# Altium PCB PCB1.PcbDoc
Units mil, origin at the board's own origin, x right, y up, seen from the top; angles counter-clockwise.
Board outline 1550 x 1086.3 mil, 2 copper layers (Top Layer, Bottom Layer); 11 components, 21 nets, 59 pads, 0 vias.
Unrouted connection lines stored in the file: 1.
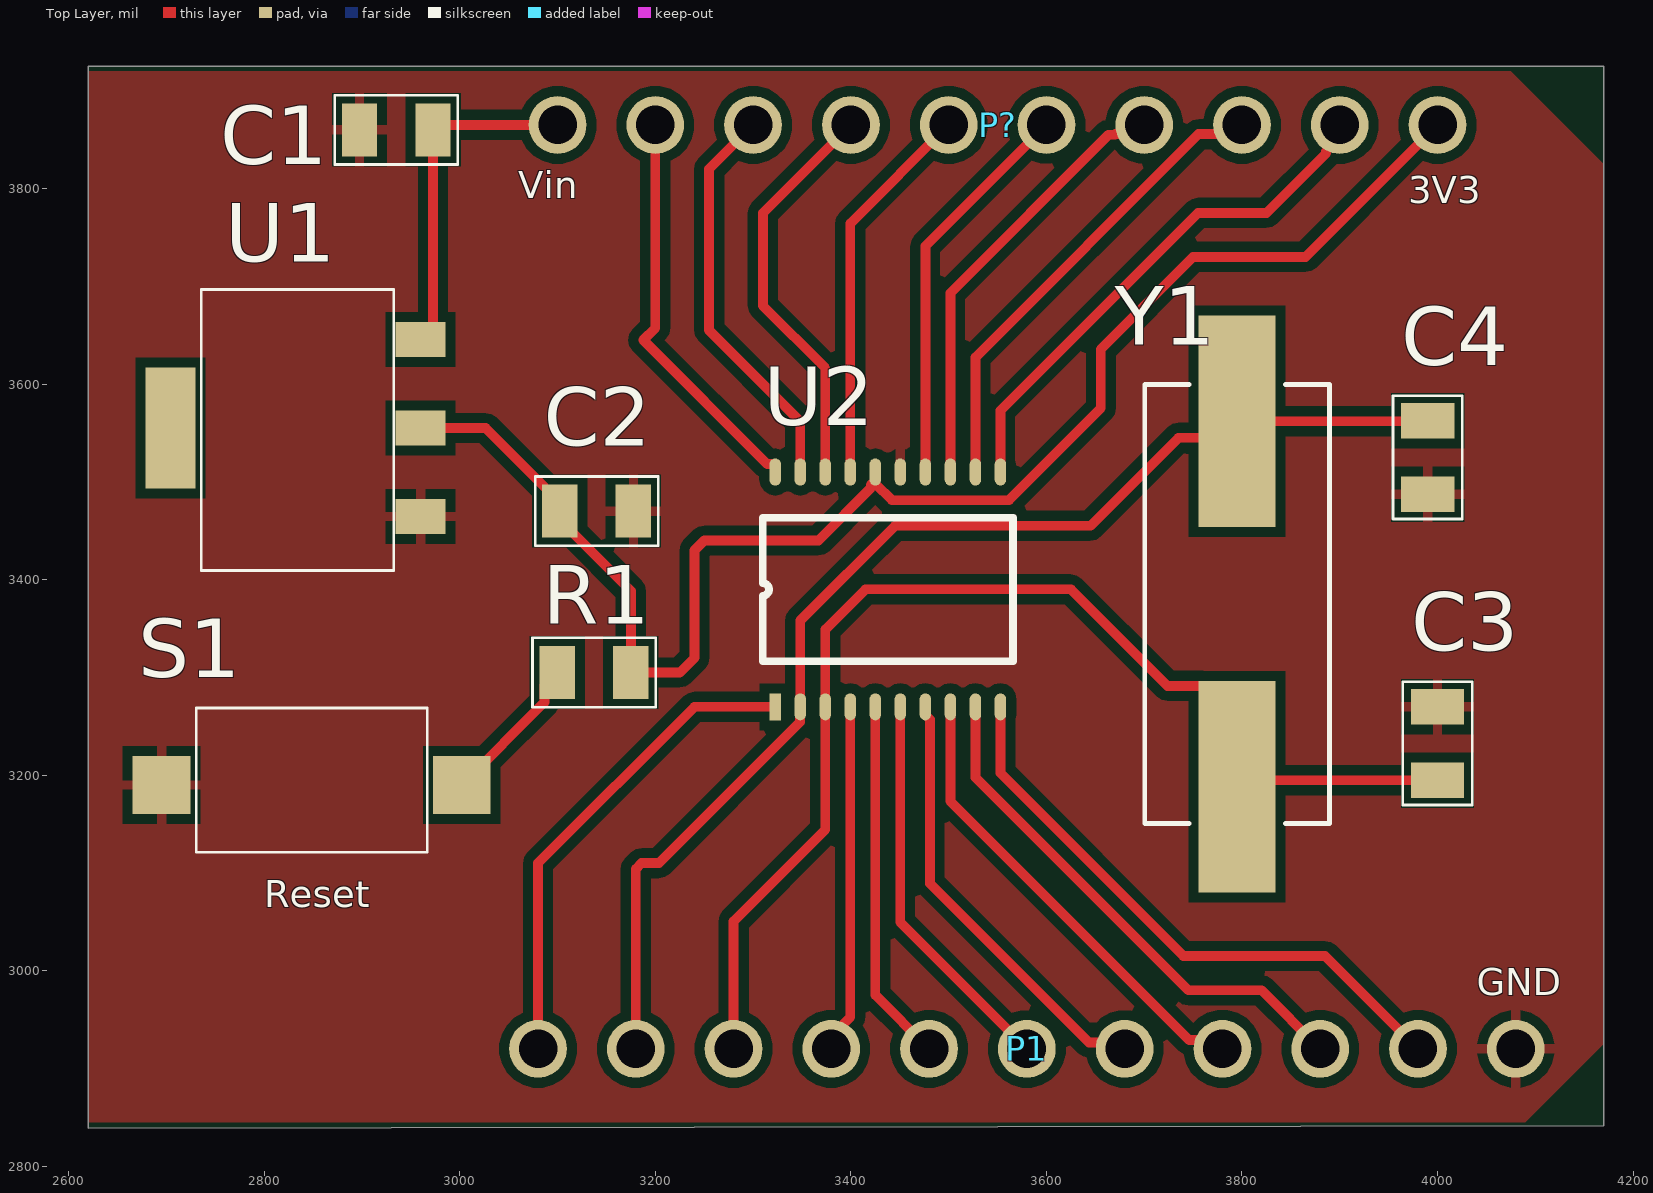
[diagram p0: Top Layer view]
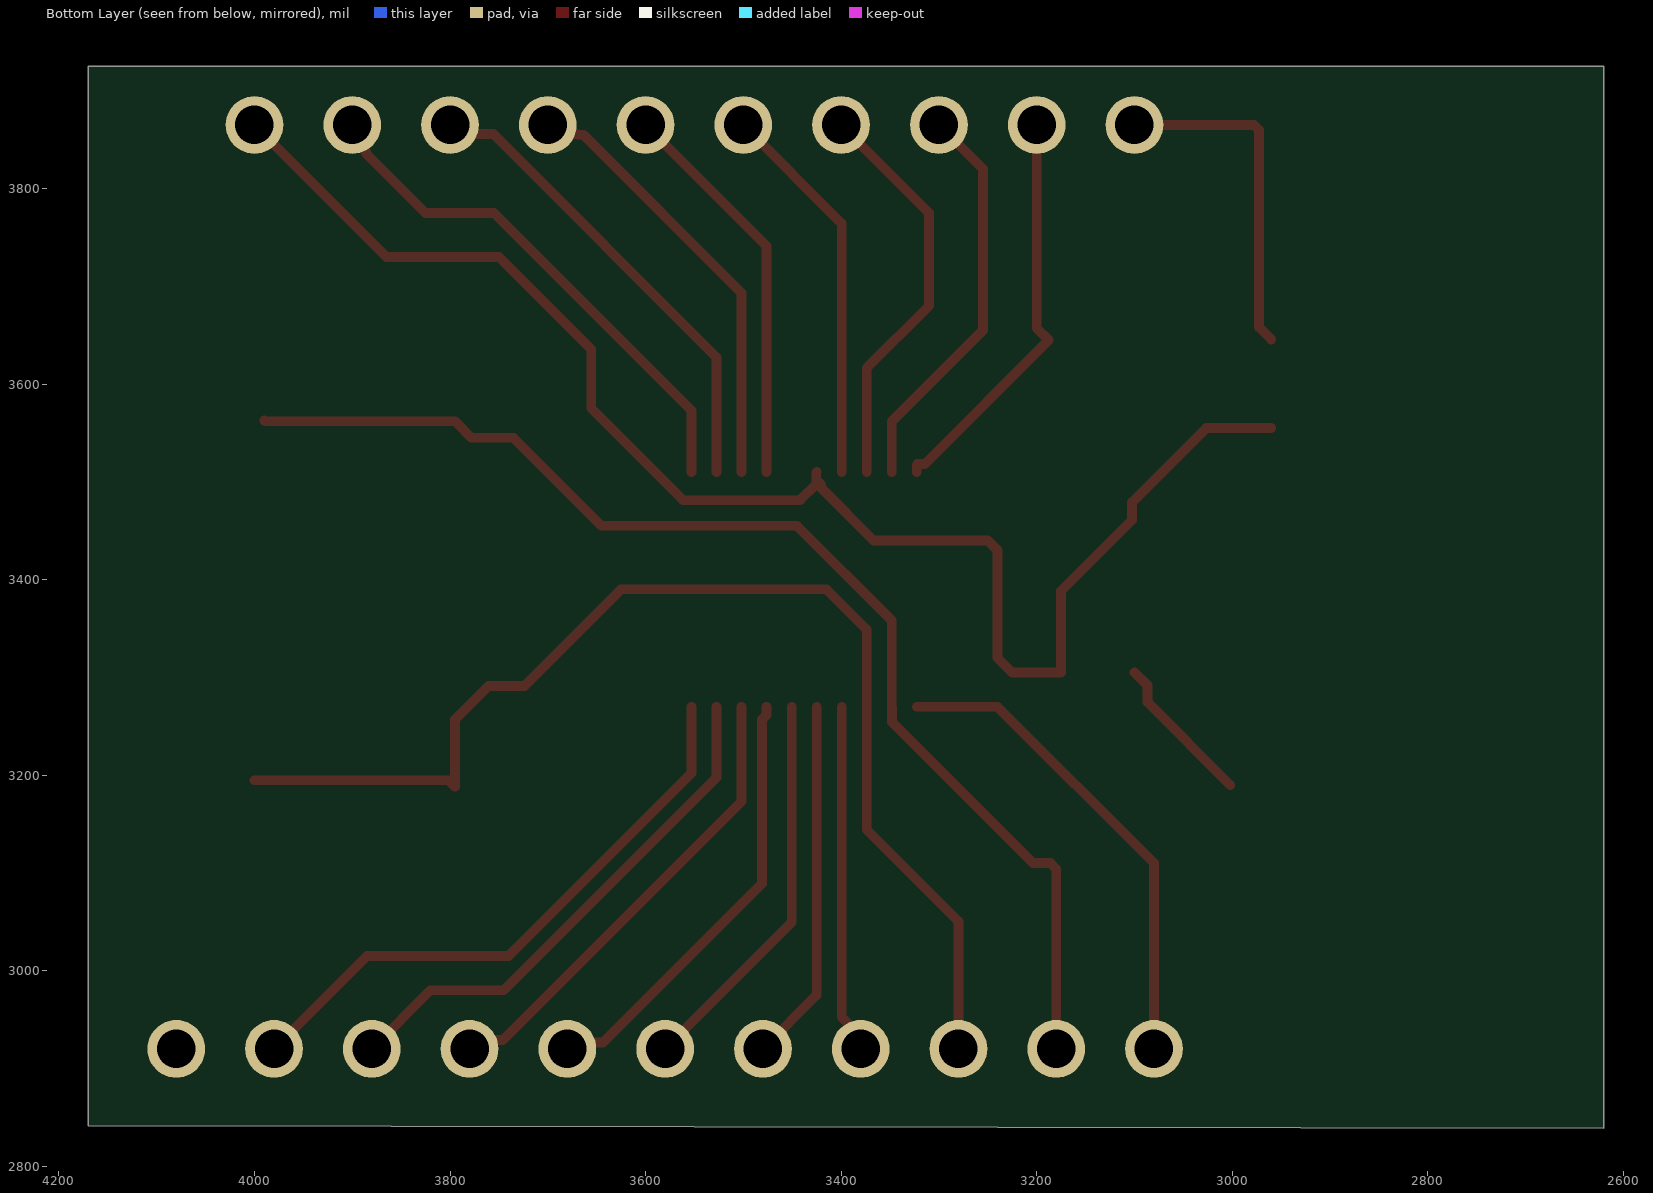
[diagram p1: Bottom Layer view, seen from below]
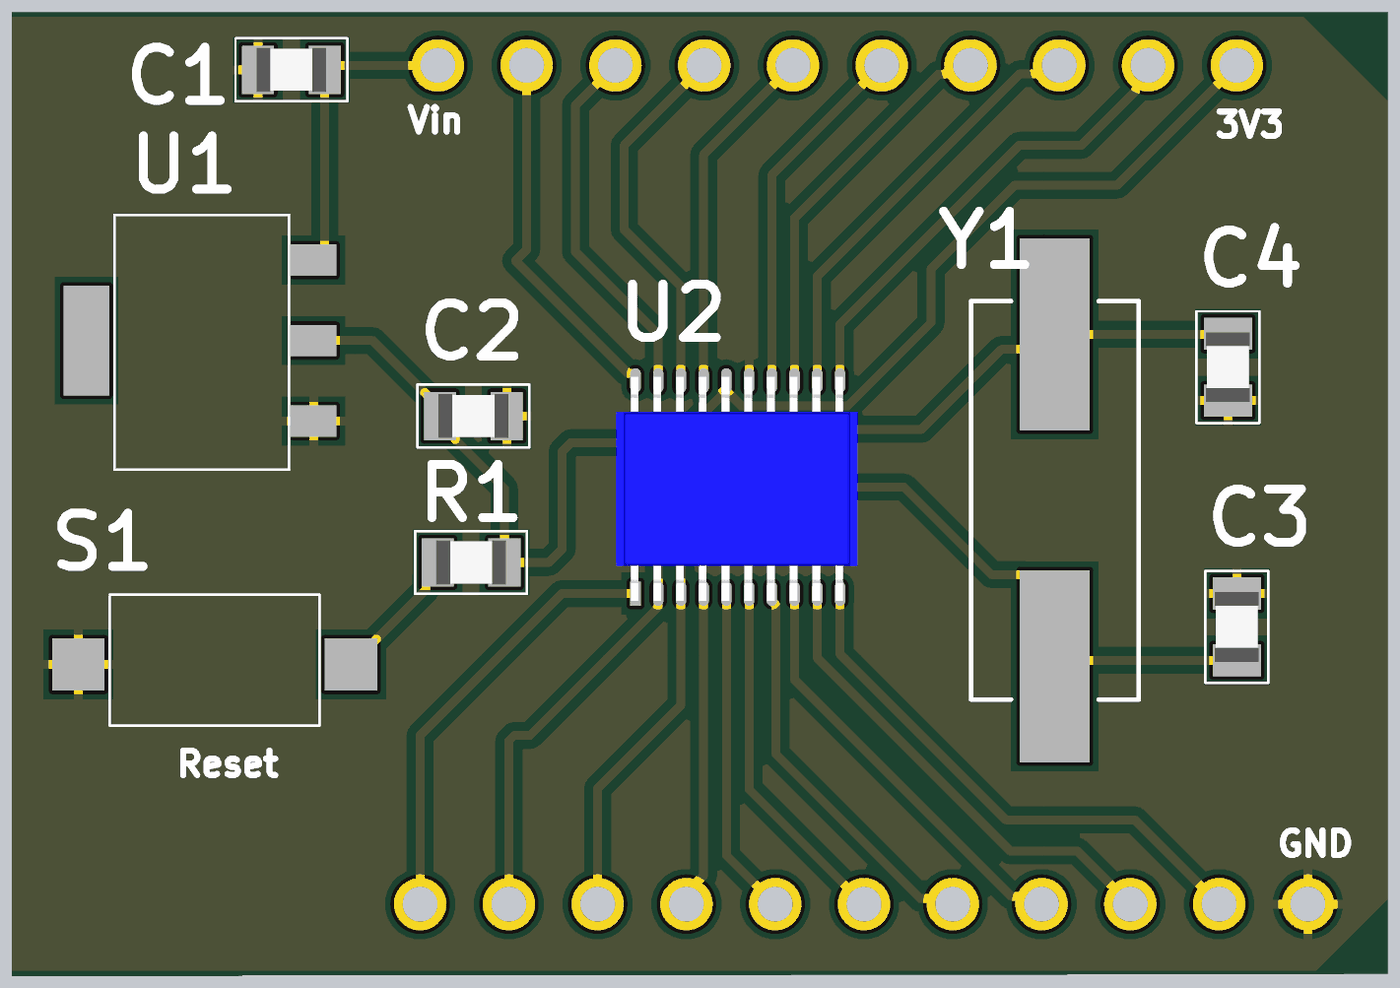
[diagram p2: 3D render of the assembled board from above, using the file's embedded part models]

## Layer stack, top to bottom
Top Solder: solder mask 0.4, Solder Resist, Dk 3.5
Top Layer: signal copper 1.4
Dielectric 1: dielectric 12.6, FR-4, Dk 4.8
Bottom Layer: signal copper 1.4
Bottom Solder: solder mask 0.4, Solder Resist, Dk 3.5

## Board outline
2620,2838.7 2620,3925 4170,3925 4170,2841.46

## Design rules (kind name [scope] priority, off if disabled: settings)
Clearance [All] p1: gap=10 ignorepadtopadclearanceinfootprint=FALSE except(0: Arc-Hole Track-Hole SMDPad-Hole THPad-Hole Via-Hole Fill-Hole Poly-Hole Region-Hole Text-Hole)
PolygonConnect [All] p1: connectstyle=Relief reliefconductorwidth=10 reliefentries=4 polygonreliefangle="90 Angle" airgapwidth=10
RoutingVias [All] p1: holewidth=28 width=50 viastyle="Through Hole" minholewidth=28 minwidth=50 maxholewidth=28 maxwidth=50
SolderMaskExpansion [All] p1: expansion=4 istentingtop=FALSE
Width [All] p1: maxlimit=10 minlimit=10 preferedwidth=10
30 further rules are at their usual default settings.

## Components (designator, comment, footprint, x,y, rotation, side; value= is the part's Value field where it differs from the comment)
C1 "10uF" "0805 package" 2935,3860 r180 top
C2 "22uF" "0805 package" 3140,3470 r0 top
C3 "20pF" "0805 package" 4000,3232.4 r270 top
C4 "20pF" "0805 package" 3990,3525 r90 top
P1 "header1" headers 3480,2920 r0 top
P? "header2" "headers 2" 3500,3865 r0 top
R1 "resistor 10k" "0805 package" 3137.4,3305 r0 top
S1 "switch" switch 2848.54,3190 r0 top
U1 "AMS1117" AMS1117 2830.08,3555 r90 top
U2 "STM32F030" "TSSOP20 package" 3322.64,3269.84 r90 top
Y1 "8mhz" "8Mhz oscilator" 3795,3375 r90 top

## Footprints (in the part's own frame and the unit in brackets; to place one, negate y for a bottom-side part, rotate by r counter-clockwise, add the part's x,y. Pads: shape width x height; smd on the part's side, far side on the other; paste and mask are expansions set on the pad)
"8Mhz oscilator" [mm]
  rect 5.5x2 smd: 1(-4.75,0) 2(4.75,0)
  silkscreen extent -5.7,-2.4 5.7,2.4
"0805 package" [mm]
  rect 0.92x1.38 smd: 1(-0.955,0) 2(0.955,0)
  silkscreen extent -1.6,-0.9 1.6,0.9, body extent -1,-0.63 1,0.63, height 0.43
AMS1117 [mm]
  rect 0.9x1.3 smd: 1(-2.3,-3.3) 2(0,-3.3) 3(2.3,-3.3)
  rect 3.15x1.3 smd: 4(0,3.2)
  silkscreen extent -3.7,-2.6 3.6,2.4
headers [mm]
  round 1.5 hole 1: 1(-10.16,0) 2(-7.62,0) 3(-5.08,0) 4(-2.54,0) 5(0,0) 6(2.54,0) 7(5.08,0) 8(7.62,0) 9(10.16,0) 10(12.7,0) 11(15.24,0)
"headers 2" [mm]
  round 1.5 hole 1: 1(-10.16,0) 2(-7.62,0) 3(-5.08,0) 4(-2.54,0) 5(0,0) 6(2.54,0) 7(5.08,0) 8(7.62,0) 9(10.16,0) 10(12.7,0)
switch [mm]
  rect 1.5x1.5 smd: 1(-3.9,0) 2(3.9,0)
  silkscreen extent -3,-1.75 3,2
"TSSOP20 package" [mm]
  rect 0.7x0.3 smd: 1(0,0)
  oval 0.7x0.3 smd: 2(0,-0.65) 3(0,-1.3) 4(0,-1.95) 5(0,-2.6) 6(0,-3.25) 7(0,-3.9) 8(0,-4.55) 9(0,-5.2) 10(0,-5.85) 11(6.1,-5.85) 12(6.1,-5.2) 13(6.1,-4.55) 14(6.1,-3.9) 15(6.1,-3.25) 16(6.1,-2.6) 17(6.1,-1.95) 18(6.1,-1.3) 19(6.1,-0.65) 20(6.1,0)
  silkscreen extent 1.18,-6.18 4.92,0.33, body extent -0.2,-6.35 6.2,0.55, height 1.1

## Part data
C1: library part "capacitor 10uF"
C2: library part "capacitor 22uF"
C3 C4: library part "capacitor 20pF"
Y1: library part "8mhz oscilator"

## Nets (pads, with @x,y where several pads share a name; then routed paths per layer and width w, separated by ;. In a path a pad name is that pad's centre, name@x,y a point inside that pad or via, vN(x,y) a via of type N, cw(c..) or ccw(c..) an arc to the next point about the centre after c; other vN are vias at no path point)
3V3: C2.1 P?.10 R1.2 U1.2 U2.16 | length 1564.1
  Top Layer w10: U1.2 3026.46,3555 3102.4,3479.06 C2.1 3102.4,3460.94 3175,3388.35 R1.2 3225,3305 3240,3320 3240,3430 3250,3440 3366.85,3440 3420.31,3493.47 3420.31,3496.95 U2.16@3425,3501.64 ; U2.16 3425.35,3509.65 3425.35,3497.81 3441.93,3481.22 3561.61,3481.22 3655.51,3575.12 3655.51,3635.51 3750,3730 3865,3730 P?.10
boot: P1.1 U2.1 | length 498.8
  Top Layer w10: P1.1 3080,3110 3239.84,3269.84 U2.1
GND: C1.2 C2.2 C3.1 C4.1 P1.11 S1.1 U1.1 U2.15
IN: C1.1 P?.1 U1.3 | length 349.1
  Top Layer w10: U1.3 2972.6,3658.15 C1.1 2977.6,3865 P?.1
nrst: P1.4 R1.1 S1.2 U2.4 | length 513.4
  Top Layer w10: S1.2 3086.69,3274.61 3086.69,3291.89 R1.1 ; P1.4 3380,2933.27 3399.41,2952.68 U2.4
pa0: P1.6 U2.6 | length 403.4
  Top Layer w10: U2.6 3450.59,3049.41 P1.6
pa1: P1.7 U2.7 | length 451.8
  Top Layer w10: U2.7 3476.18,3261.48 3480.87,3256.79 3480.87,3089.13 3643.51,2926.49 3673.51,2926.49 P1.7
pa2: P1.8 U2.8 | length 479.7
  Top Layer w10: U2.8 3501.77,3173.23 3746.01,2928.99 3771.01,2928.99 P1.8
pa3: P1.9 U2.9 | length 539.8
  Top Layer w10: U2.9 3527.36,3197.64 3745,2980 3820,2980 P1.9
pa4: P1.10 U2.10 | length 611.7
  Top Layer w10: U2.10 3552.95,3202.05 3740,3015 3885,3015 P1.10
pa5: P?.9 U2.11 | length 506.7
  Top Layer w10: U2.11 3552.95,3572.95 3755,3775 3825,3775 3886.01,3836.01 3886.01,3837.74
pa6: P?.8 U2.12 | length 488.4
  Top Layer w10: U2.12 3527.36,3627.36 3755.61,3855.61 3790.61,3855.61 P?.8
pa7: P?.7 U2.13 | length 452.6
  Top Layer w10: U2.13 3501.77,3693.23 3663.54,3855 3670,3855 3670.61,3855.61 3690.61,3855.61 P?.7
pa9: P?.5 U2.17 | length 396.7
  Top Layer w10: U2.17 3399.41,3764.41 P?.5
pa10: P?.4 U2.18 | length 418.7
  Top Layer w10: U2.18 3373.82,3616.18 3310,3680 3310,3775 P?.4
pa13: P?.3 U2.19 | length 412.3
  Top Layer w10: P?.3 3255,3820 3255,3655 3348.23,3561.77 U2.19
pa14: P?.2 U2.20 | length 420.4
  Top Layer w10: P?.2 3200,3657.36 3187.64,3645 3314.42,3518.22 3321.8,3518.22 3322.64,3517.38 U2.20
pb1: P?.6 U2.14 | length 406.3
  Top Layer w10: U2.14 3476.18,3741.18 P?.6
pf0: C4.2 P1.2 U2.2 Y1.2 | length 1244.8
  Top Layer w10: P1.2 3180,3104.14 3185.86,3110 3203.69,3110 3347.88,3254.19 3347.88,3269.5 U2.2 3348.23,3358.23 3445,3455 3645,3455 3735,3545 3777.99,3545 Y1.2 3989.41,3562.01 C4.2
pf1: C3.2 P1.3 U2.3 Y1.1 | length 1237.8
  Top Layer w10: P1.3 3280,3050.47 3373.82,3144.29 U2.3 3373.82,3348.82 3415,3390 3625,3390 3723.74,3291.26 3760.63,3291.26 3795,3256.89 Y1.1 3801.81,3194.8 C3.2
vdda: P1.5 U2.5 | length 372.6
  Top Layer w10: U2.5 3425,2975 P1.5
pads on no net: U1.4

## Polygon pours and split planes (outlines as drawn)
GND on Top Layer "GND_L01_P000" (solid, pour order 0): 4075,3920 4170,3825 4170,2925 4090,2845 2620,2845 2620,3920 2705,3920

## Silkscreen, mask and mechanical layers (free items; w line width, h text height)
Top Overlay:
  text "Vin" at 3060,3790 h27.56
  text "3V3" at 3970,3785 h27.56
  text "Reset" at 2800,3065 h27.56
  text "GND" at 4040,2975 h27.56